# Altium PCB PCB_BAJA_TESTE.PcbDoc
Units mm, origin at the board's own origin, x right, y up, seen from the top; angles counter-clockwise.
Board outline 152.4 x 101.6 mm, 2 copper layers (Top Layer, Bottom Layer); 19 components, 43 nets, 142 pads, 0 vias.
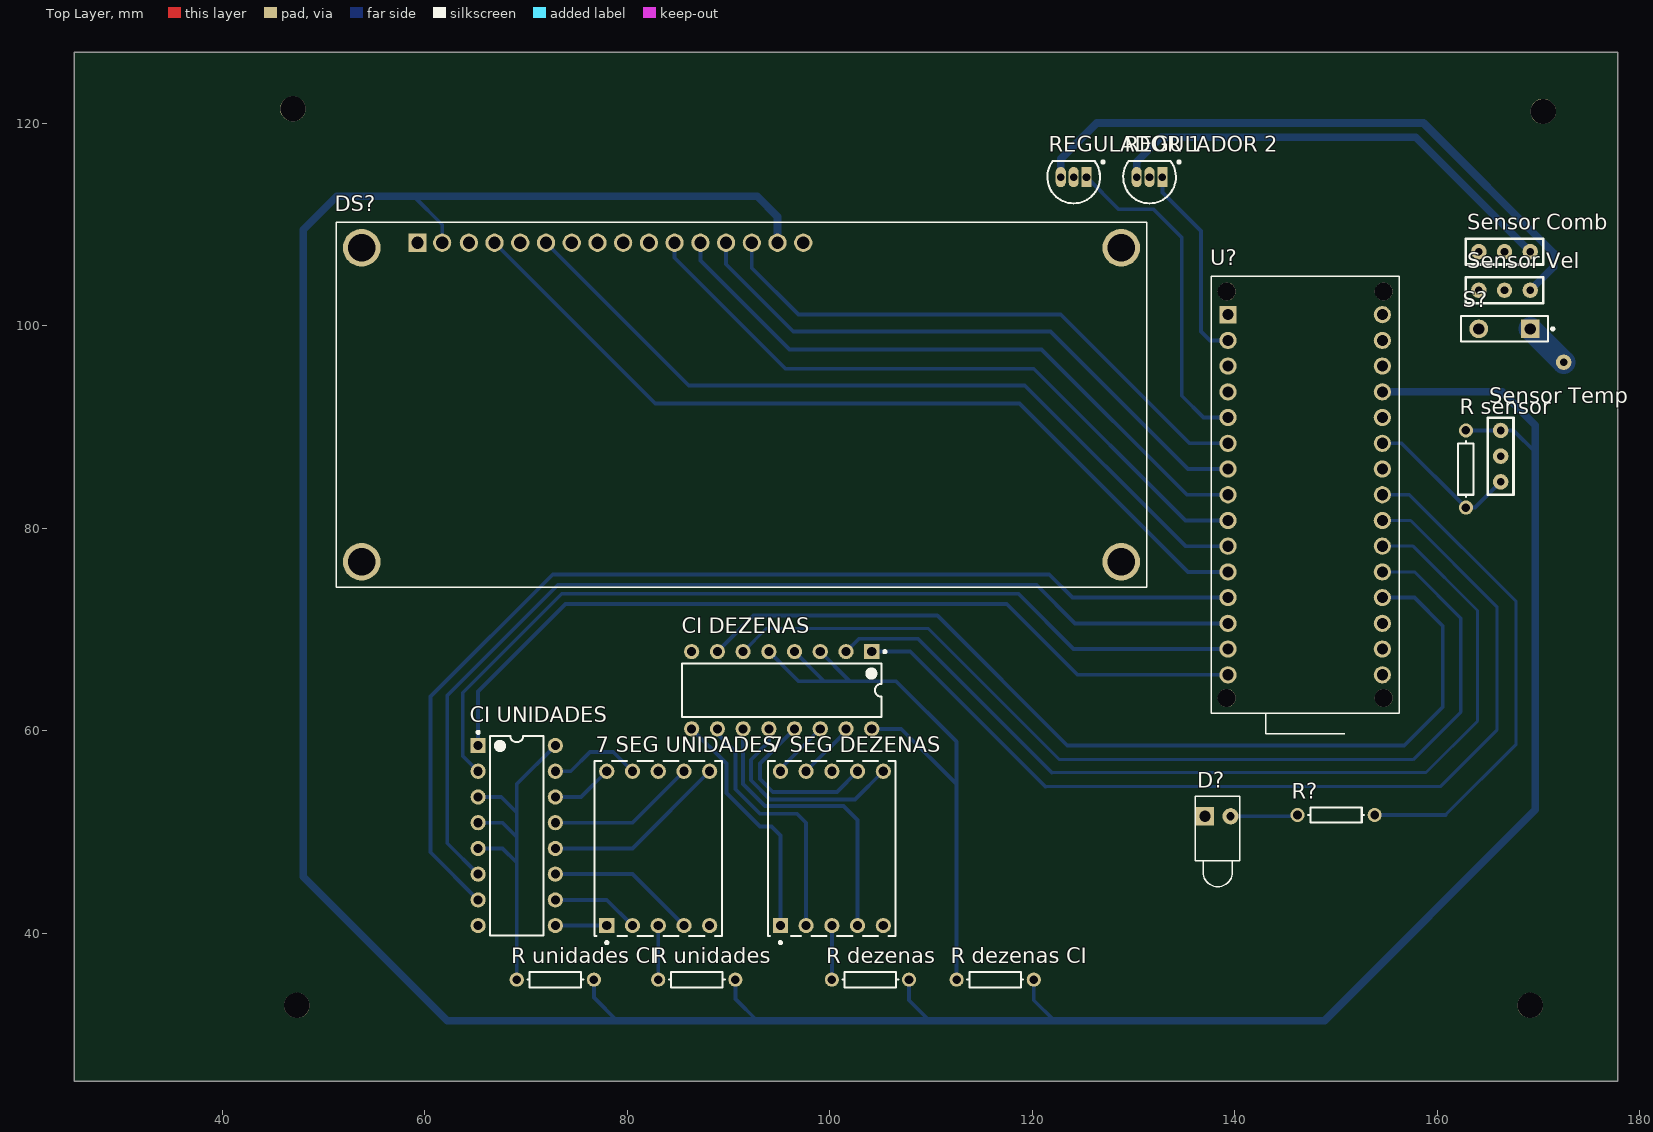
[diagram p0: Top Layer view]
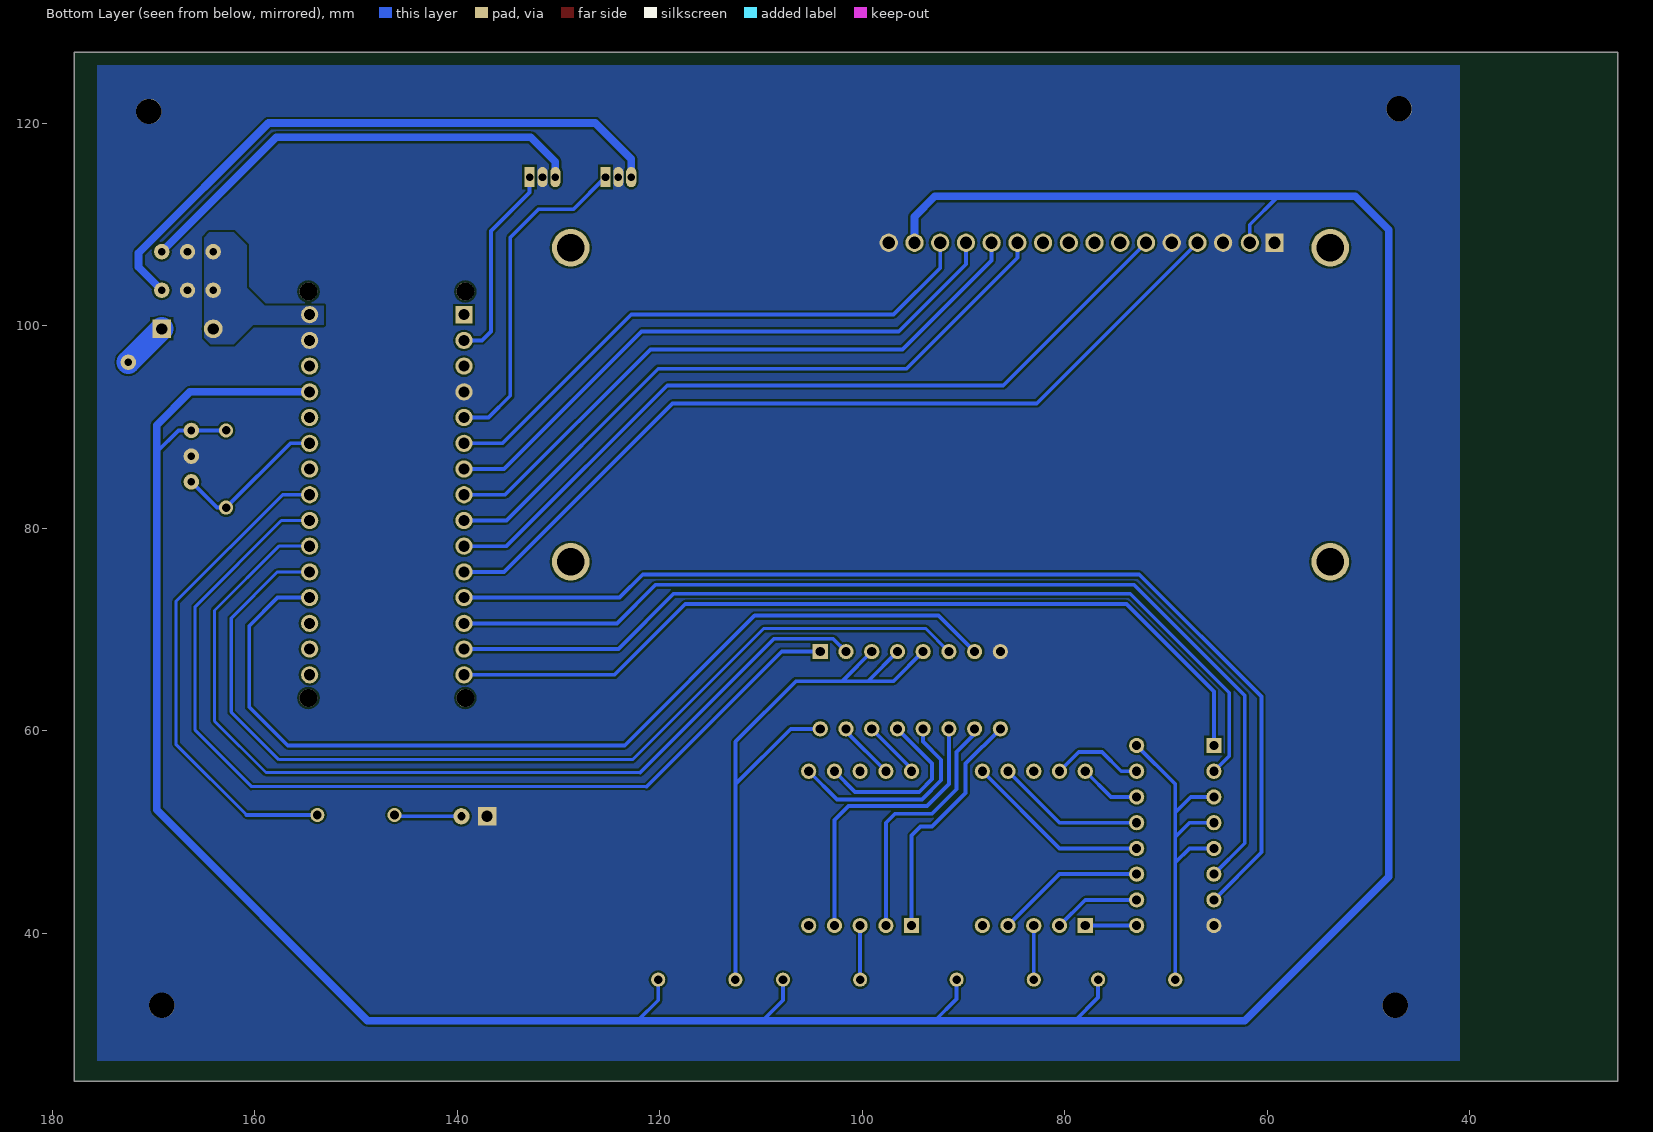
[diagram p1: Bottom Layer view, seen from below]

## Layer stack, top to bottom
Top Solder: solder mask 0.0102, Solder Resist, Dk 3.5
Top Layer: signal copper 0.0356
Dielectric 1: dielectric 0.32, FR-4, Dk 4.8
Bottom Layer: signal copper 0.0356
Bottom Solder: solder mask 0.0102, Solder Resist, Dk 3.5

## Board outline
25.4,25.4 177.8,25.4 177.8,127 25.4,127

## Design rules (kind name [scope] priority, off if disabled: settings)
Clearance [All] p1: gap=0.203 ignorepadtopadclearanceinfootprint=FALSE
HoleSize [All] p1: absolutevalues=TRUE maxlimit=2.54 minlimit=0.305 maxpercent=80.000 minpercent=20.000
MinimumAnnularRing [All] p1: minimumring=0.203
PlaneClearance [All] p1: clearance=0
PolygonConnect [All] p1: connectstyle=Direct reliefconductorwidth=0.254 reliefentries=4 polygonreliefangle="90 Angle" airgapwidth=0.254
RoomDefinition Sheet1 [InComponentClass('Sheet1')] p1: confinementstyle=ConfineIn formatcopy=TRUE lockcomponents=FALSE outline 41.021,27.432 175.514,27.432 175.514,125.73 41.021,125.73
RoutingVias [All] p1: holewidth=0.711 width=1.27 viastyle="Through Hole" minholewidth=0.711 minwidth=1.27 maxholewidth=0.711 maxwidth=1.27
SolderMaskExpansion [All] p1: expansion=0.102
UnConnectedPin [All] p1:
Width [All] p1: maxlimit=12.7 minlimit=0.305 preferedwidth=0.381
28 further rules are at their usual default settings.

## Components (designator, comment, footprint, x,y, rotation, side; value= is the part's Value field where it differs from the comment)
"7 SEG DEZENAS" "HDSP-5601" H-10 100.203,48.387 r0 top
"7 SEG UNIDADES" "HDSP-5601" H-10 83.058,48.387 r0 top
"CI DEZENAS" "SN74LS47N" TI-N16 95.25,64.008 r270 top
"CI UNIDADES" "SN74LS47N" TI-N16 69.088,49.657 r0 top
D? "LED1" LED-1 138.303,51.562 r270 top
DS? "LCM-S01602DTR/A" LCD_LCM-S01602DTR/A 91.828,91.896 r0 top
"R dezenas" "Res1" AXIAL-0.3 104.013,35.433 r0 top value=220
"R dezenas CI" "Res1" AXIAL-0.3 116.332,35.433 r0 top value=1K
"R sensor" "Res1" AXIAL-0.3 162.814,85.852 r90 top value=4,7K
"R unidades" "Res1" AXIAL-0.3 86.868,35.433 r0 top value=220
"R unidades CI" "Res1" AXIAL-0.3 72.898,35.433 r0 top value=1K
R? "330" AXIAL-0.3 149.987,51.689 r180 top value=1K
"REGULADOR 1" "LM78L05ACZ" Z03A 124.079,114.681 r90 top
"REGULADOR 2" "LM78L05ACZ" Z03A 131.572,114.681 r90 top
S? "SW-PB" SPST-2 166.624,99.695 r180 top
"Sensor Comb" "Sensor" Sensor 166.624,107.315 r0 top
"Sensor Temp" "Sensor" Sensor 166.243,87.122 r270 top
"Sensor Vel" "Sensor" Sensor 166.624,103.505 r0 top
U? "A000005" ARDUINO_A000005 146.939,83.312 r0 top

## Footprints (in the part's own frame and the unit in brackets; to place one, negate y for a bottom-side part, rotate by r counter-clockwise, add the part's x,y. Pads: shape width x height; smd on the part's side, far side on the other; paste and mask are expansions set on the pad)
ARDUINO_A000005 [mm]
  rect 1.7x1.7 hole 1.1: 1(-7.62,17.78)
  round 1.7 hole 1.1: 2(-7.62,15.24) 3(-7.62,12.7) 4(-7.62,10.16) 5(-7.62,7.62) 6(-7.62,5.08) 7(-7.62,2.54) 8(-7.62,0) 9(-7.62,-2.54) 10(-7.62,-5.08) 11(-7.62,-7.62) 12(-7.62,-10.16) 13(-7.62,-12.7) 14(-7.62,-15.24) 15(-7.62,-17.78) 16(7.62,-17.78) 17(7.62,-15.24) 18(7.62,-12.7) 19(7.62,-10.16) 20(7.62,-7.62) 21(7.62,-5.08) 22(7.62,-2.54) 23(7.62,0) 24(7.62,2.54) 25(7.62,5.08) 26(7.62,7.62) 27(7.62,10.16) 28(7.62,12.7) 29(7.62,15.24) 30(7.62,17.78)
  round 1.778 hole 1.778 unplated: None(-7.747,-20.066) None(-7.747,20.066) None(7.747,-20.066) None(7.747,20.066)
  silkscreen extent -9.27,-23.59 9.27,21.59
AXIAL-0.3 [mm] "Axial Device, Thru-Hole; 2 Leads; 0.3 in Pin Spacing"
  round 1.4 hole 0.85: 1(-3.81,0) 2(3.81,0)
  silkscreen extent -2.77,-0.76 2.77,0.76
H-10 [mm] "LED, 7-Segment Display, 14.22 mm, RHD; 10 Leads; Row Space 15.24 mm; Pitch 2.54 mm"
  rect 1.5x1.5 hole 0.9: 1(-5.08,-7.62)
  round 1.5 hole 0.9: 2(-2.54,-7.62) 3(0,-7.62) 4(2.54,-7.62) 5(5.08,-7.62) 6(5.08,7.62) 7(2.54,7.62) 8(0,7.62) 9(-2.54,7.62) 10(-5.08,7.62)
  silkscreen extent -6.3,-9.42 6.3,8.65
LCD_LCM-S01602DTR/A [mm]
  rect 1.8x1.8 hole 1.2: 1(-32.55,16.3)
  round 1.8 hole 1.2: 2(-30.1,16.3) 3(-27.47,16.3) 4(-24.93,16.3) 5(-22.39,16.3) 6(-19.85,16.3) 7(-17.31,16.3) 8(-14.77,16.3) 9(-12.23,16.3) 10(-9.69,16.3) 11(-7.15,16.3) 12(-4.61,16.3) 13(-2.07,16.3) 14(0.47,16.3) 15(3.01,16.3) 16(5.55,16.3)
  round 3.716 hole 2.7: 17(-38.05,15.8) 18(-38.05,-15.2) 19(36.95,15.8) 20(36.95,-15.2)
  silkscreen extent -40.55,-17.7 39.45,18.3
LED-1 [mm] "LED; 2 Leads"
  round 1.6 hole 0.8: 1(0,1.27)
  rect 1.85x1.85 hole 1.1: 2(0,-1.27)
  silkscreen extent -2,-2.2 6.95,2.2
Sensor [mil]
  round 60 hole 30: 0(-100,0) 1(0,0) 2(100,0)
  silkscreen extent -150,-50 150,50
SPST-2 [mm] "Switch; 2 Leads"
  rect 1.85x1.85 hole 1.1: 1(-2.54,0)
  round 1.85 hole 1.1: 2(2.54,0)
  silkscreen extent -4.89,-1.27 4.28,1.27
TI-N16 [mm] "DIP, 16-Leads, Body 19.305x6.35 mm, Pitch 2.54 mm"
  rect 1.5x1.5 hole 0.9: 1(-3.81,8.89)
  round 1.5 hole 0.9: 2(-3.81,6.35) 3(-3.81,3.81) 4(-3.81,1.27) 5(-3.81,-1.27) 6(-3.81,-3.81) 7(-3.81,-6.35) 8(-3.81,-8.89) 9(3.81,-8.89) 10(3.81,-6.35) 11(3.81,-3.81) 12(3.81,-1.27) 13(3.81,1.27) 14(3.81,3.81) 15(3.81,6.35) 16(3.81,8.89)
  silkscreen extent -3.93,-9.85 2.65,10.32, body extent -3.95,-9.85 3.95,9.85, height 5.08
Z03A [mm] "TO, Flat Index; 3 In-Line, Axial Leads; Body Dia. 5mm; Leads 0.55 x 0.50 mm (max)"
  rect 2x1 hole 0.75: 1(0,-1.27)
  oval 2x1 hole 0.75: 2(0,0) 3(0,1.27)
  silkscreen extent -2.6,-3.03 1.6,2.6, body extent -2.6,-2.61 1.6,2.61, height 5.2

## Part data
"7 SEG DEZENAS" "7 SEG UNIDADES": "14.22 mm Gray Surface Green 7-Segment Display: CA, RH DP", ComponentLink1Description="Manufacturer Link", ComponentLink1URL=http://www.avagotech.com/, ComponentLink2Description=Datasheet, ComponentLink2URL=http://cp.literature.agilent.com/litweb/pdf/5988-4273EN.pdf, DatasheetVersion=17-Jan-2002, LatestRevisionDate=11-Oct-2004, LatestRevisionNote="Display outline superimposed on PCB Footprint.", Note="Pins 3 and 8 are redundant Anodes.", PackageDescription="LED, 7-Segment Display, 14.22 mm, RHD; 10 Leads; Row Space 15.24 mm; Pitch 2.54 mm", PackageReference=H-10, PackageVersion=11-Mar-2003, Published=26-May-2004, Publisher="Altium Limited"
"CI DEZENAS" "CI UNIDADES": "BCD-to-7-Segment Decoder / Driver, 4.75 to 5.25 V, 0 to 70 degC, 16-pin DIP (N16), Pb-Free (RoHS)", Manufacturer="Texas Instruments", Rating=Catalog, Supplier Part Number 1=296-3712-5-ND, Code_JEDEC=MS-001, ComponentLink1Description="Manufacturer URL", ComponentLink1URL=http://www.ti.com/, ComponentLink2Description=Datasheet, ComponentLink2URL=http://www.ti.com/general/docs/lit/getliterature.tsp?genericPartNumber=SN74LS47&fileType=pdf, ComponentLink3Description="Package Specification", ComponentLink3URL=http://www.ti.com/litv/pdf/mpdi002c, DatasheetVersion=SDLS111, Eco-Plan="Pb-Free (RoHS)", Mounting Technology="Through Hole", PackageDescription="16-Pin Plastic In-Line, Body 19.305 x 6.35 mm, Pitch 2.54 mm", PackageReference=N16, PackageVersion=4040049/E, PartNumber=SN74LS47N, SubFamily="Discrete Segment LED Driver", Supplier 1=Digi-Key, Supplier 2=Farnell, Supplier 3=Newark, Supplier 4=Mouser, Supplier Part Number 2=1739829, Supplier Part Number 3=60K6887, Supplier Part Number 4=595-SN74LS47N, Vin(Max)(V)=5.25, Vin(Min)(V)=4.75
D?: "Typical RED GaAs LED", LatestRevisionDate=08-Jul-2005, LatestRevisionNote="Mech Layer 1 removed.", PackageDescription="LED; 2 Leads", PackageReference=LED-1, Published=8-Jun-2000, Publisher="Altium Limited"
DS?: "Module, LCD; 16 x 2 mm; 5 x 8; 5 V _Typ._; 2 mA _Typ._; 4.2 V @50 degC _Min._", Package=None, Availability=Unavailable, MF="Lumex Opto/Components", MP=LCM-S01602DTR/A, Price=None, SnapEDA_Link=https://www.snapeda.com/parts/LCM-S01602DTR/A/Lumex%20Opto/Components%20Inc./view-part/?ref=snap
"R dezenas" "R dezenas CI" "R sensor" "R unidades" "R unidades CI": "Resistor", LatestRevisionDate=17-Jul-2002, LatestRevisionNote="Re-released for DXP Platform.", PackageDescription="Axial Device, Thru-Hole; 2 Leads; 0.3 in Pin Spacing", PackageReference=AXIAL-0.3, Published=8-Jun-2000, Publisher="Altium Limited"
R?: library part Res1, "Resistor", LatestRevisionDate=17-Jul-2002, LatestRevisionNote="Re-released for DXP Platform.", PackageDescription="Axial Device, Thru-Hole; 2 Leads; 0.3 in Pin Spacing", PackageReference=AXIAL-0.3, Published=8-Jun-2000, Publisher="Altium Limited"
"REGULADOR 1" "REGULADOR 2": "3-Terminal Positive Regulators, 3-pin TO-92", Manufacturer="National Semiconductor", PackageTopMarking=NSXYTT*LM78L*05ACZ, PowerWise=N, Code_JEDEC=TO-226-AA, ComponentLink1Description="Manufacturer URL", ComponentLink1URL=http://www.national.com/, ComponentLink2Description="LM78L05 Datasheet", ComponentLink2URL=http://www.national.com/ds/LM/LM78L05.pdf, ComponentLink3Description="LM78L05 Web Page", ComponentLink3URL=http://www.national.com/pf/LM/LM78L05.html, ComponentLink4Description="Z03A Package Page", ComponentLink4URL=http://www.national.com/packaging/folders/z03a.html, CompType="LDO IC", DatasheetVersion=Apr-2006, High-Reliability=Y, PackageDescription="TO-92, Molded, 3 Lead", PackageReference=Z03A, PackageVersion="revG, Sep-2000", PartNumber=LM78L05ACZ, PinCount=3, RoHS=N
S?: "Switch", LatestRevisionDate=17-Jul-2002, LatestRevisionNote="Re-released for DXP Platform.", PackageDescription="Switch; 2 Leads", PackageReference=SPST-2, Published=24-Mar-1999, Publisher="Altium Limited"
U?: "MICRO, ARDUINO NANO 3.0, MINI-B USB, ATmega328, 0.1DIP, ICSP HDR", Package=None, Digi-Key_Part_Number=1050-1001-ND, Digi-Key_Purchase_URL=https://www.digikey.com.br/product-detail/en/arduino/A000005/1050-1001-ND/2638989?utm_source=snapeda&utm_medium=aggregator&utm_campaign=symbol, MF=Arduino, MP=A000005, SnapEDA_Link=https://www.snapeda.com/parts/A000005/Arduino/view-part/?ref=snap

## Free pads (board coordinates)
  round 1.524 hole 0.762: 11(172.466,96.393)
  round 2.5 hole 2.5 mask+0: 13(46.99,121.412) 13(47.371,32.893) 13(169.164,32.893) 13(170.434,121.158)

## Nets (pads, with @x,y where several pads share a name; then routed paths per layer and width w, separated by ;. In a path a pad name is that pad's centre, name@x,y a point inside that pad or via, vN(x,y) a via of type N, cw(c..) or ccw(c..) an arc to the next point about the centre after c; other vN are vias at no path point)
12V: pad.11 S?.1 | length 4.7
  Bottom Layer w2.286: S?.1 pad.11
GND: "CI DEZENAS.8" "CI UNIDADES.8" "REGULADOR 1.2" "REGULADOR 2.2" "Sensor Comb.1" "Sensor Temp.1" "Sensor Vel.1" D?.2 DS?.1 DS?.3 DS?.5 DS?.16 pad.13 U?.4 U?.29
"Net7 SEG DEZENAS_1": "7 SEG DEZENAS.1" "CI DEZENAS.9" | length 23.7
  Bottom Layer w0.381: 86.36,60.198 89.789,56.769 89.789,53.848 93.091,50.546 94.234,50.546 95.123,49.657 95.123,40.767
"Net7 SEG DEZENAS_2": "7 SEG DEZENAS.2" "CI DEZENAS.10" | length 25.2
  Bottom Layer w0.381: 88.9,60.198 88.9,59.69 90.678,57.912 90.678,54.229 93.091,51.816 96.774,51.816 97.663,50.927 97.663,40.767
"Net7 SEG DEZENAS_3": "7 SEG DEZENAS.3" "R dezenas.1" | length 5.3
  Bottom Layer w0.381: 100.203,35.433 100.203,40.767
"Net7 SEG DEZENAS_4": "7 SEG DEZENAS.4" "CI DEZENAS.11" | length 28.7
  Bottom Layer w0.381: 91.44,60.198 91.44,54.737 93.599,52.578 101.346,52.578 102.743,51.181 102.743,40.767
"Net7 SEG DEZENAS_6": "7 SEG DEZENAS.6" "CI DEZENAS.12" | length 20.8
  Bottom Layer w0.381: 93.98,60.198 93.98,58.928 92.202,57.15 92.202,55.118 94.107,53.213 102.489,53.213 105.283,56.007
"Net7 SEG DEZENAS_7": "7 SEG DEZENAS.7" "CI DEZENAS.13" | length 17.4
  Bottom Layer w0.381: 96.52,60.198 93.091,56.769 93.091,55.245 94.361,53.975 100.711,53.975 102.743,56.007
"Net7 SEG DEZENAS_9": "7 SEG DEZENAS.9" "CI DEZENAS.15" | length 5.8
  Bottom Layer w0.381: 97.663,56.007 101.6,59.944 101.6,60.198
"Net7 SEG DEZENAS_10": "7 SEG DEZENAS.10" "CI DEZENAS.14" | length 6.2
  Bottom Layer w0.254: 99.06,59.817 99.06,60.198
  Bottom Layer w0.381: 95.123,56.007 95.123,56.261 99.06,60.198
"Net7 SEG UNIDADES_1": "7 SEG UNIDADES.1" "CI UNIDADES.9" | length 5.1
  Bottom Layer w0.381: 72.898,40.767 77.597,40.767 77.851,41.021
"Net7 SEG UNIDADES_2": "7 SEG UNIDADES.2" "CI UNIDADES.10" | length 8.7
  Bottom Layer w0.381: 72.898,43.307 77.978,43.307 80.518,40.767
"Net7 SEG UNIDADES_3": "7 SEG UNIDADES.3" "R unidades.1" | length 5.3
  Bottom Layer w0.381: 83.058,35.433 83.058,40.767
"Net7 SEG UNIDADES_4": "7 SEG UNIDADES.4" "CI UNIDADES.11" | length 14.8
  Bottom Layer w0.381: 72.898,45.847 80.518,45.847 85.598,40.767
"Net7 SEG UNIDADES_6": "7 SEG UNIDADES.6" "CI UNIDADES.12" | length 18.4
  Bottom Layer w0.381: 72.898,48.387 80.518,48.387 88.138,56.007
"Net7 SEG UNIDADES_7": "7 SEG UNIDADES.7" "CI UNIDADES.13" | length 14.8
  Bottom Layer w0.381: 72.898,50.927 80.518,50.927 85.598,56.007
"Net7 SEG UNIDADES_9": "7 SEG UNIDADES.9" "CI UNIDADES.15" | length 9.2
  Bottom Layer w0.381: 72.898,56.007 74.422,56.007 76.327,57.912 78.613,57.912 80.518,56.007
"Net7 SEG UNIDADES_10": "7 SEG UNIDADES.10" "CI UNIDADES.14" | length 6.1
  Bottom Layer w0.381: 72.898,53.467 75.438,53.467 77.978,56.007
"NetCI DEZENAS_1": "CI DEZENAS.1" U?.22 | length 96.6
  Bottom Layer w0.305: 121.285,54.483 160.274,54.483 165.862,60.071 165.862,72.263 157.353,80.772 U?.22
  Bottom Layer w0.381: 104.14,67.818 107.95,67.818 121.285,54.483
"NetCI DEZENAS_2": "CI DEZENAS.2" U?.21 | length 93.4
  Bottom Layer w0.305: 121.92,55.88 158.877,55.88 163.957,60.96 163.957,71.882 157.607,78.232 U?.21
  Bottom Layer w0.381: 101.6,67.818 102.87,69.088 108.712,69.088 121.92,55.88
"NetCI DEZENAS_3": "CI DEZENAS.3" "CI DEZENAS.4" "CI DEZENAS.5" "CI DEZENAS.16" "R dezenas CI.1" | length 64.6
  Bottom Layer w0.381: 93.98,67.818 96.901,64.897 99.441,64.897 ; 96.52,67.818 99.441,64.897 ; 99.06,67.818 101.854,65.024 101.854,64.897 ; 104.14,60.198 107.061,60.198 112.522,54.737 ; 112.522,35.433 112.522,54.737 ; 99.441,64.897 101.854,64.897 ; 101.854,64.897 106.553,64.897 112.522,58.928 112.522,54.737
"NetCI DEZENAS_6": "CI DEZENAS.6" U?.20 | length 98
  Bottom Layer w0.305: 91.44,67.818 93.726,70.104 109.728,70.104 122.682,57.15 157.607,57.15 162.306,61.849 162.306,71.12 157.734,75.692 U?.20
"NetCI DEZENAS_7": "CI DEZENAS.7" U?.19 | length 95.1
  Bottom Layer w0.381: 88.9,67.818 92.456,71.374 110.617,71.374 123.444,58.547 156.718,58.547 160.528,62.357 160.528,70.358 157.734,73.152 U?.19
"NetCI UNIDADES_1": "CI UNIDADES.1" U?.15 | length 85.8
  Bottom Layer w0.381: 65.278,58.547 65.278,63.881 73.914,72.517 117.475,72.517 124.46,65.532 U?.15
"NetCI UNIDADES_2": "CI UNIDADES.2" U?.14 | length 90.3
  Bottom Layer w0.381: 65.278,56.007 63.754,57.531 63.754,63.754 73.533,73.533 118.618,73.533 124.079,68.072 U?.14
"NetCI UNIDADES_3": "CI UNIDADES.3" "CI UNIDADES.4" "CI UNIDADES.5" "CI UNIDADES.16" "R unidades CI.1" | length 37.9
  Bottom Layer w0.381: 65.278,48.387 67.691,48.387 69.088,46.99 ; 65.278,50.927 67.691,50.927 69.088,49.53 ; 65.278,53.467 67.564,53.467 69.088,51.943 ; 69.088,35.433 69.088,46.99 ; 72.898,58.547 69.088,54.737 69.088,51.943 ; 69.088,46.99 69.088,49.53 ; 69.088,49.53 69.088,51.943
"NetCI UNIDADES_6": "CI UNIDADES.6" U?.13 | length 102.1
  Bottom Layer w0.381: 65.278,45.847 62.23,48.895 62.23,63.5 73.152,74.422 120.396,74.422 124.206,70.612 U?.13
"NetCI UNIDADES_7": "CI UNIDADES.7" U?.12 | length 106.7
  Bottom Layer w0.381: 65.278,43.307 60.579,48.006 60.579,63.373 72.644,75.438 121.666,75.438 123.952,73.152 U?.12
NetD?_1: D?.1 R?.2 | length 6.7
  Bottom Layer w0.381: D?.1 146.05,51.562 R?.2
NetDS?_2: "R dezenas CI.2" "R dezenas.2" "R sensor.2" "R unidades CI.2" "R unidades.2" "Sensor Temp.0" DS?.2 DS?.15 U?.27 | length 339.4
  Bottom Layer w0.381: 58.928,112.776 61.728,109.976 DS?.2 ; 76.708,35.433 76.708,33.655 78.994,31.369 ; 90.678,35.433 90.678,33.528 92.837,31.369 ; 107.823,35.433 107.823,33.401 109.855,31.369 ; 120.142,35.433 120.142,33.401 122.174,31.369 ; 162.814,89.662 166.243,89.662 167.513,89.662 169.672,87.503
  Bottom Layer w0.762: DS?.15 94.838,110.775 92.837,112.776 58.928,112.776 51.308,112.776 48.006,109.474 48.006,45.593 62.23,31.369 78.994,31.369 92.837,31.369 109.855,31.369 122.174,31.369 148.844,31.369 169.672,52.197 169.672,87.503 169.672,90.17 166.37,93.472 U?.27
NetDS?_4: DS?.4 U?.11 | length 85.9
  Bottom Layer w0.381: DS?.4 82.765,92.329 118.745,92.329 135.382,75.692 U?.11
NetDS?_6: DS?.6 U?.10 | length 79.8
  Bottom Layer w0.381: DS?.6 86.067,94.107 119.253,94.107 135.128,78.232 U?.10
NetDS?_11: DS?.11 U?.9 | length 66.9
  Bottom Layer w0.381: DS?.11 84.678,106.711 95.631,95.758 120.142,95.758 135.128,80.772 U?.9
NetDS?_12: DS?.12 U?.8 | length 63.4
  Bottom Layer w0.381: DS?.12 87.218,106.457 96.012,97.663 120.904,97.663 135.255,83.312 U?.8
NetDS?_13: DS?.13 U?.7 | length 60.1
  Bottom Layer w0.381: DS?.13 89.758,106.076 96.393,99.441 121.793,99.441 135.382,85.852 U?.7
NetDS?_14: DS?.14 U?.6 | length 56.7
  Bottom Layer w0.381: DS?.14 92.298,105.695 96.901,101.092 122.809,101.092 135.509,88.392 U?.6
"NetR sensor_1": "R sensor.1" "Sensor Temp.2" U?.25 | length 15.4
  Bottom Layer w0.381: U?.25 156.464,88.392 162.814,82.042 163.703,82.042 166.243,84.582
NetR?_1: R?.1 U?.23 | length 48.5
  Bottom Layer w0.305: U?.23 157.226,83.312 167.767,72.771 167.767,58.674 160.782,51.689
  Bottom Layer w0.381: R?.1 160.782,51.689
"NetREGULADOR 1_1": "REGULADOR 1.1" U?.5 | length 33
  Bottom Layer w0.381: 125.349,114.681 128.524,111.506 131.953,111.506 134.747,108.712 134.747,93.091 136.906,90.932 U?.5
"NetREGULADOR 1_3": "REGULADOR 1.3" "Sensor Vel.2" | length 61.8
  Bottom Layer w0.762: 122.809,114.681 122.809,116.459 126.365,120.015 158.623,120.015 171.45,107.188 171.45,105.791 169.164,103.505
"NetREGULADOR 2_1": "REGULADOR 2.1" U?.2 | length 19.9
  Bottom Layer w0.381: 132.842,114.681 132.842,113.157 136.652,109.347 136.652,99.441 137.541,98.552 U?.2
"NetREGULADOR 2_3": "REGULADOR 2.3" "Sensor Comb.2" | length 46.1
  Bottom Layer w0.762: 130.302,114.681 130.302,116.205 132.715,118.618 157.861,118.618 169.164,107.315
NetS?_2: "Sensor Comb.0" "Sensor Vel.0" S?.2 U?.30 | length 0.3
  Bottom Layer w0.381: 164.084,103.505 164.084,103.378 164.211,103.505
pads on no net: "7 SEG DEZENAS.5" "7 SEG DEZENAS.8" "7 SEG UNIDADES.5" "7 SEG UNIDADES.8" DS?.7 DS?.8 DS?.9 DS?.10 DS?.17 DS?.18 DS?.19 DS?.20 U?.1 U?.3 U?.16 U?.17 U?.18 U?.24 U?.26 U?.28 U?.None

## Polygon pours and split planes (outlines as drawn)
GND on Bottom Layer "Bottom Layer-GND" (solid, pour order 16): 41.021,125.73 175.514,125.73 175.514,27.432 175.424,27.432 175.17,27.432 41.021,27.432
no net on Bottom Layer "Bottom Layer-No Net 2" (solid, pour order 8): 161.29,101.346
NetS?_2 on Bottom Layer "Bottom Layer-NetS?_2" (solid, pour order 10): 153.162,101.981 159.004,101.981 160.782,103.759 160.782,107.95 162.052,109.22 164.465,109.22 164.973,108.712 164.973,98.806 164.338,98.171 162.052,98.171 160.147,100.076 153.162,100.076
no net on Bottom Layer "Bottom Layer-No Net 3" (solid, pour order 2): 55.753,52.07
no net on Bottom Layer "Bottom Layer-No Net" (solid, pour order 14): 157.353,99.441
no net on Bottom Layer "Bottom Layer-No Net 1" (solid, pour order 12): 156.845,101.727